# EAGLE board uo_C_SE_Front_Panel (EAGLE 9.5.2)
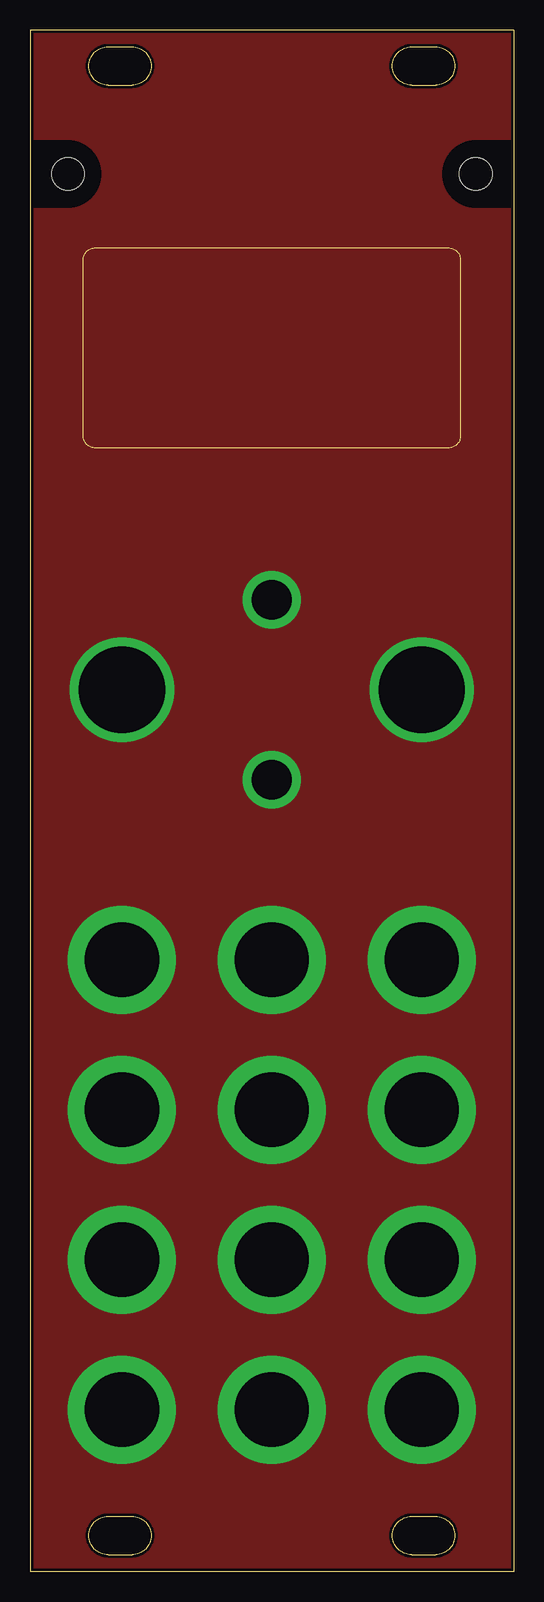
[diagram p0: board, top side]
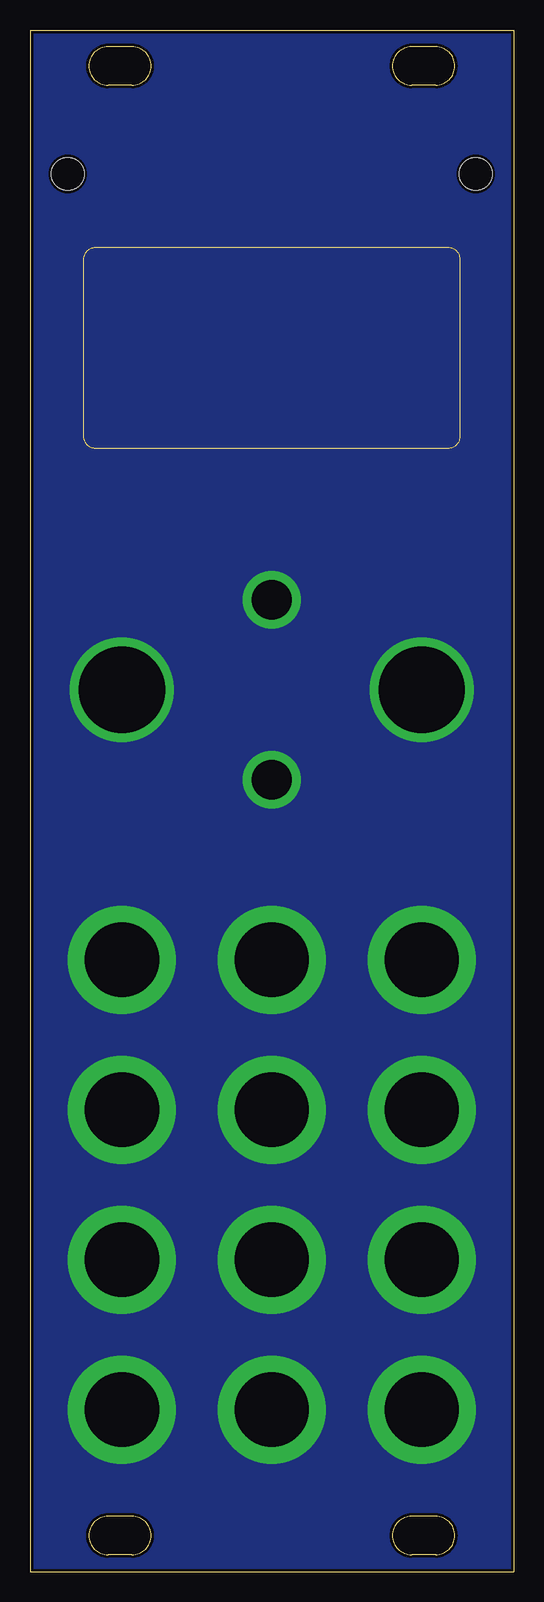
[diagram p1: board, bottom side, seen from below]

Size 40.3 x 128.5 mm. Coordinates in mm from the lower left corner, seen from the top.
Outline: 40.3,128.5 0,128.5 0,0 40.3,0 40.3,128.5
Outline: 6.5,123.9 arc-180 6.5,127.1 8.5,127.1 arc-180 8.5,123.9 6.5,123.9
Outline: 6.5,1.4 arc-180 6.5,4.6 8.5,4.6 arc-180 8.5,1.4 6.5,1.4
Outline: 31.8,1.4 arc-180 31.8,4.6 33.8,4.6 arc-180 33.8,1.4 31.8,1.4
Outline: 31.8,123.9 arc-180 31.8,127.1 33.8,127.1 arc-180 33.8,123.9 31.8,123.9
Copper layers (1*16): Top 0.035mm / dielectric 1.5mm / Bottom 0.035mm
Design rules "default *": minimum track width 10mil, minimum drill 24mil, track to track 8mil, track to pad 8mil, pad to pad 8mil, via to via 8mil, smd to smd 8mil, copper to edge 0.25mm, drill to drill 8mil, minimum pad ring 6mil, minimum via ring 6mil, stop-mask expansion 0mil, vias tented up to drill 0mil, thermal gap 10mil
Holes 2.7 mm at 3.15,116.5 37.15,116.5
tRestrict: area 0.4,113.7 to 5.9,119.3; area 0,113.7 to 3.1,119.3; area 34.4,113.7 to 39.9,119.3; area 37.1,113.7 to 40.3,119.3
Milling: 8 lines

## Placement (x,y rotation side)
E$1  [NEG-OUT]  32.65,58.5 0 top

## Library data of the parts
E$1 = uo_C_SE_Library

## Tracks (layer width: path | path; a pad name or v marks a point on that pad's centre or on a via)
GND  (via drill 3.3 pad 4.8, 6.2 pad 9, 7.2 pad 8.7)
  other vias: 7.65,51 32.65,51 20.15,51 7.65,38.5 32.65,38.5 20.15,38.5 32.65,73.5 7.65,73.5 7.65,26 32.65,26 20.15,26 7.65,13.5 32.65,13.5 20.15,66 20.15,81 20.15,13.5
  pour Top (no thermals): 0,128.5 40.3,128.5 40.3,0 0,0
  pour Bottom (no thermals): 0,128.5 40.3,128.5 40.3,0 0,0

## Text on the board
tStop: TD-OCSE-C | tall-dog.com | μ | o_C | SE | polymorphic 4×CV | P1 | P2 | TRIG | CV | CC BY-NC-SA 4.0
bStop: μo_C SE / Front Panel / TD-OCSE-C-FP/B / CC BY-NC-SA 4.0 / 2020-02-22 / tall-dog.com
Document: DO NOT PLACE ANY ADDITIONAL / MARKINGS OR TEXT ON THE / TOP SIDE OF THIS BOARD | ⌀2.7 MM | ⌀5.0 MM × 90° | ⌀2.7 MM | ⌀5.0 MM × 90° | COUNTERSINK / ON TOP SIDE / (NOT PLATED) | COUNTERSINK / ON TOP SIDE / (NOT PLATED) | R 2.0 MM | R 1.0 MM | CUTOUT / (PLATED) | 16.7 MM | 18.7 MM | COUNTERBORE TO / DEPTH OF 1.0 MM / ON BOTTOM SIDE / (NOT PLATED) | 31.42 MM | 33.42 MM